# Altium PCB pcb.PcbDoc
Units mm, origin at the board's own origin, x right, y up, seen from the top; angles counter-clockwise.
Board outline 76.2 x 58.42 mm, 2 copper layers (Top Layer, Bottom Layer), stack 0.325 mm thick; 9 components, 19 nets, 123 pads, 4 vias.
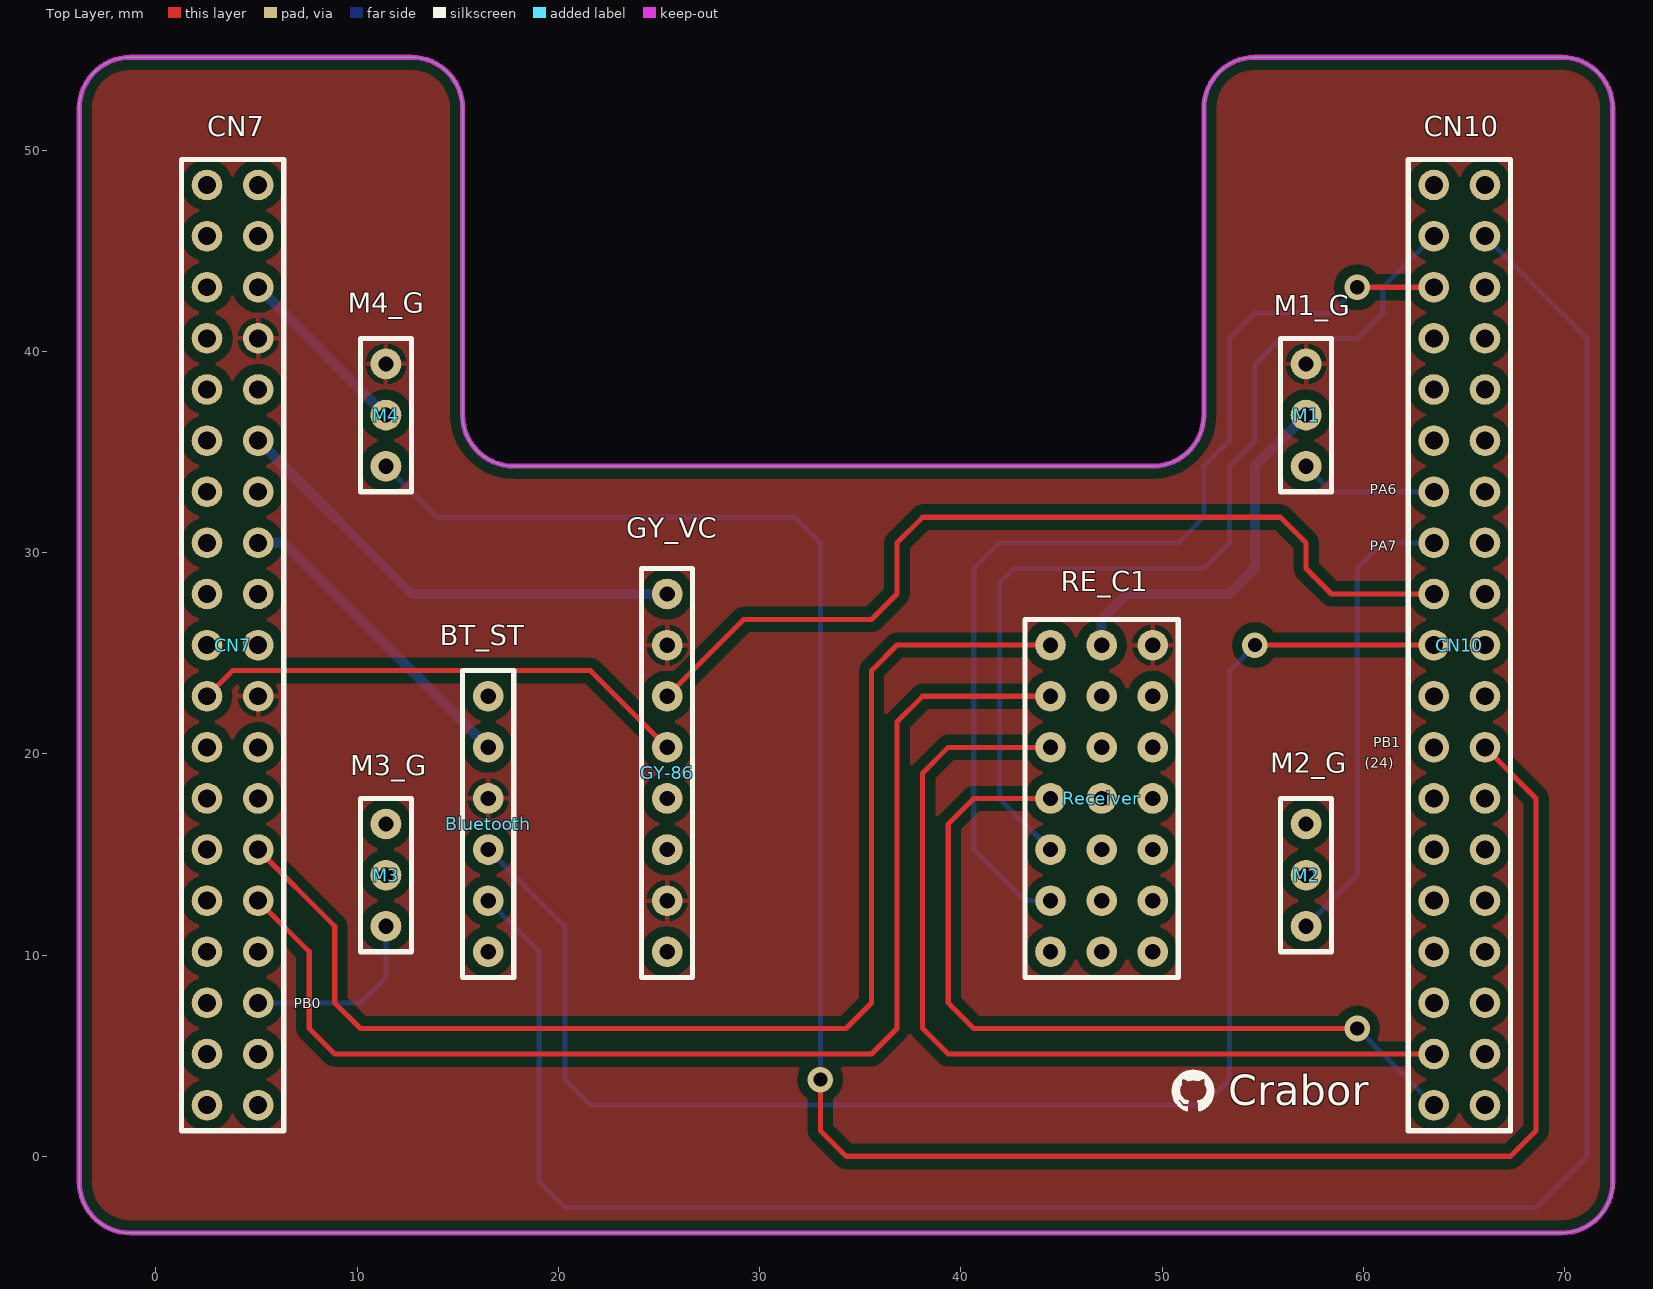
[diagram p0: Top Layer view]
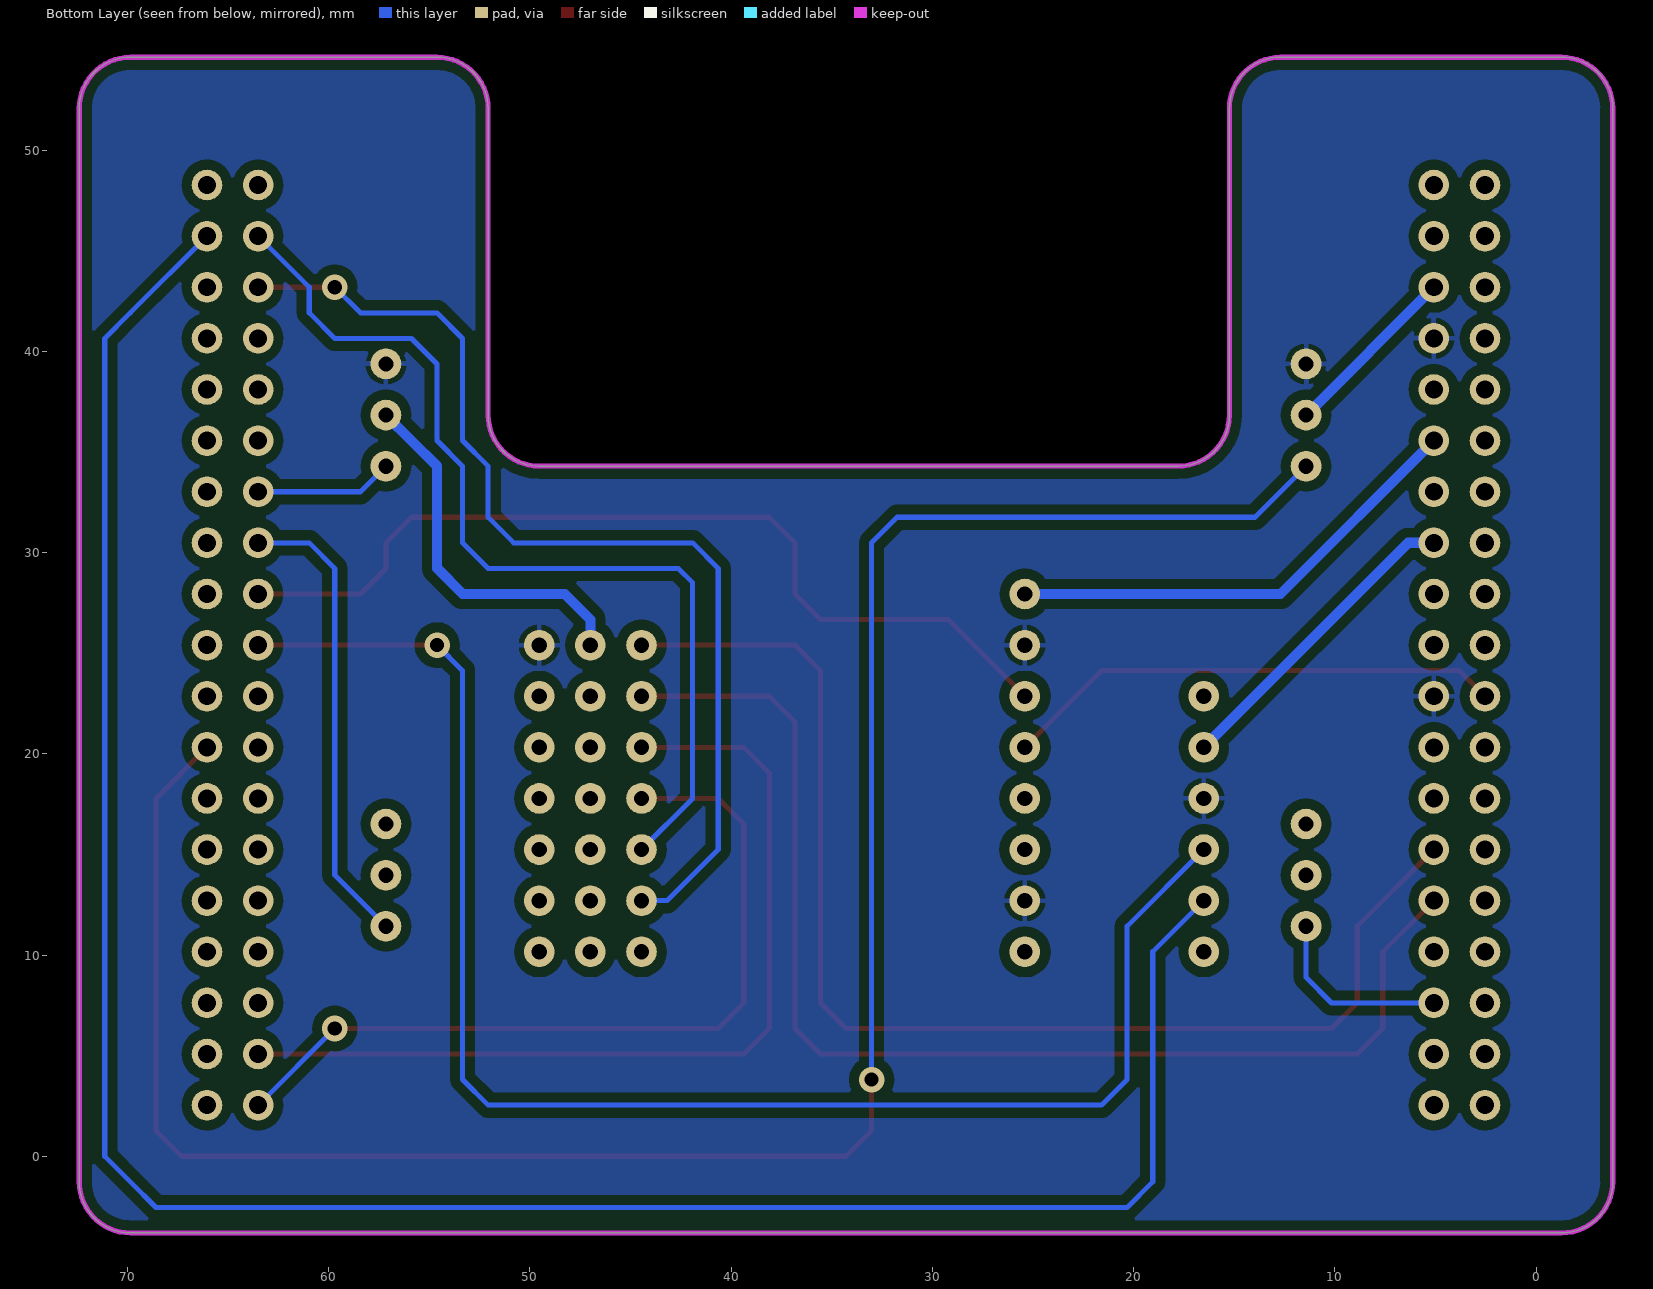
[diagram p1: Bottom Layer view, seen from below]

## Layer stack, top to bottom
Top Solder: solder mask 0.0102, Solder Resist, Dk 3.5
Top Layer: signal copper 0.0356
Dielectric 1: core 0.254, FR-4, Dk 4.2
Bottom Layer: signal copper 0.0356
Bottom Solder: solder mask 0.0102, Solder Resist, Dk 3.5

## Board outline
-3.81,-1.27 ccw(c-1.27,-1.27) -1.27,-3.81 69.85,-3.81 ccw(c69.85,-1.27) 72.39,-1.27 72.39,52.07 ccw(c69.85,52.07) 69.85,54.61 54.61,54.61 ccw(c54.61,52.07) 52.07,52.07 52.07,36.83 cw(c49.53,36.83) 49.53,34.29 17.78,34.29 cw(c17.78,36.83) 15.24,36.83 15.24,52.07 ccw(c12.7,52.07) 12.7,54.61 -1.27,54.61 ccw(c-1.27,52.07) -3.81,52.07

## Design rules (kind name [scope] priority, off if disabled: settings)
Clearance InPolygon [InPolygon] p1: gap=0.5
Clearance [All] p2: gap=0.254
PolygonConnect [All] p1: connectstyle=Relief reliefconductorwidth=0.254 reliefentries=4 polygonreliefangle="90 Angle" airgapwidth=0.254
RoutingVias [All] p1: holewidth=0.711 width=1.27 viastyle="Through Hole" minholewidth=0.711 minwidth=1.27 maxholewidth=0.711 maxwidth=1.27
SolderMaskExpansion [All] p1: expansion=0.102
Width Width_5V [InNetClass('5V')] p1: maxlimit=0.51 minlimit=0.506 preferedwidth=0.508
Width Width_3V3 [InNetClass('3V3')] p2: maxlimit=0.51 minlimit=0.506 preferedwidth=0.508
Width [All] p3: maxlimit=0.256 minlimit=0.252 preferedwidth=0.254
30 further rules are at their usual default settings.

## Classes and differential pairs
net class NO_GND: 3V3_1 3V3_2 5V_1 5V_2 PA0 PA1 PA2 PA3 PA6 PA7 PB0 PB1 PB6 PB7 PB8 PB9 PC6 PC7
net class 3V3: 3V3_1 3V3_2
net class 5V: 5V_1 5V_2

## Components (designator, comment, footprint, x,y, rotation, side; value= is the part's Value field where it differs from the comment)
Bluetooth "Bluetooth" Bluetooth 16.51,22.86 r0 top
CN7 "CN7" CN7 2.54,2.54 r0 top
CN10 "CN10" CN10 66.04,2.54 r0 top
GY-86 "GY-86" GY-86 25.4,27.94 r0 top
M1 "M" M 57.15,39.37 r0 top
M2 "M" M 57.15,16.51 r0 top
M3 "M" M 11.43,16.51 r0 top
M4 "M" M 11.43,39.37 r0 top
Receiver "Receiver" Receiver 46.99,25.4 r0 top

## Footprints (in the part's own frame and the unit in brackets; to place one, negate y for a bottom-side part, rotate by r counter-clockwise, add the part's x,y. Pads: shape width x height; smd on the part's side, far side on the other; paste and mask are expansions set on the pad)
Bluetooth [mil]
  round 60 hole 30: 1(0,0) 2(0,-100) 3(0,-200) 4(0,-300) 5(0,-400) 6(0,-500)
  silkscreen extent -50,-550 50,50
CN7 [mil]
  round 60 hole 35: 1(0,1800) 2(100,1800) 3(0,1700) 4(100,1700) 5(0,1600) 6(100,1600) 7(0,1500) 8(100,1500) 9(0,1400) 10(100,1400) 11(0,1300) 12(100,1300) 13(0,1200) 14(100,1200) 15(0,1100) 16(100,1100) 17(0,1000) 18(100,1000) 19(0,900) 20(100,900) 21(0,800) 22(100,800) 23(0,700) 24(100,700) 25(0,600) 26(100,600) 27(0,500) 28(100,500) 29(0,400) 30(100,400) 31(0,300) 32(100,300) 33(0,200) 34(100,200) 35(0,100) 36(100,100) 37(0,0) 38(100,0)
  silkscreen extent -50,-50 150,1850
CN10 [mil]
  round 60 hole 35: 1(-100,1800) 2(0,1800) 3(-100,1700) 4(0,1700) 5(-100,1600) 6(0,1600) 7(-100,1500) 8(0,1500) 9(-100,1400) 10(0,1400) 11(-100,1300) 12(0,1300) 13(-100,1200) 14(0,1200) 15(-100,1100) 16(0,1100) 17(-100,1000) 18(0,1000) 19(-100,900) 20(0,900) 21(-100,800) 22(0,800) 23(-100,700) 24(0,700) 25(-100,600) 26(0,600) 27(-100,500) 28(0,500) 29(-100,400) 30(0,400) 31(-100,300) 32(0,300) 33(-100,200) 34(0,200) 35(-100,100) 36(0,100) 37(-100,0) 38(0,0)
  silkscreen extent -150,-50 50,1850
GY-86 [mil]
  round 60 hole 30: 1(0,0) 2(0,-100) 3(0,-200) 4(0,-300) 5(0,-400) 6(0,-500) 7(0,-600) 8(0,-700)
  silkscreen extent -50,-750 50,50
M [mil]
  round 60 hole 30: 1(0,0) 2(0,-100) 3(0,-200)
  silkscreen extent -50,-250 50,50
Receiver [mil]
  round 60 hole 30: 1(0,0) 2(100,0) 3(-100,0) 4(-100,-100) 5(-100,-200) 6(-100,-300) 7(-100,-400) 8(-100,-500) ""(-100,-600) ""(0,-600) ""(0,-500) ""(0,-400) ""(0,-300) ""(0,-200) ""(0,-100) ""(100,-600) ""(100,-500) ""(100,-400) ""(100,-300) ""(100,-200) ""(100,-100)
  silkscreen extent -150,-650 150,50

## Via types
v1: diameter 1.27, hole 0.711, Top Layer to Bottom Layer, 4 vias

## Nets (pads, with @x,y where several pads share a name; then routed paths per layer and width w, separated by ;. In a path a pad name is that pad's centre, name@x,y a point inside that pad or via, vN(x,y) a via of type N, cw(c..) or ccw(c..) an arc to the next point about the centre after c; other vN are vias at no path point)
3V3_1: Bluetooth.2 CN7.16 | length 15.6
  Bottom Layer w0.51: CN7.16 6.35,30.48 Bluetooth.2
3V3_2: CN7.12 GY-86.1 | length 23.5
  Bottom Layer w0.51: CN7.12 12.7,27.94 GY-86.1
5V_1: CN7.6 M4.2 | length 9
  Bottom Layer w0.51: CN7.6 M4.2
5V_2: M1.2 Receiver.1 | length 18.6
  Bottom Layer w0.51: Receiver.1 46.99,26.67 48.26,27.94 53.34,27.94 54.61,29.21 54.61,34.29 55.879,35.559 M1.2
GND: Bluetooth.3 CN7.8 CN7.22 GY-86.2 GY-86.7 M1.1 M4.1 Receiver.2
PA0: CN7.28 Receiver.3 | length 62.8
  Top Layer w0.256: CN7.28 8.89,11.43 8.89,7.62 10.16,6.35 34.29,6.35 35.56,7.62 35.56,24.13 36.83,25.4 Receiver.3
PA1: CN7.30 Receiver.4 | length 61.1
  Top Layer w0.256: CN7.30 7.62,10.16 7.62,6.35 8.89,5.08 35.56,5.08 36.83,6.35 36.83,21.59 38.1,22.86 Receiver.4
PA2: CN10.35 Receiver.5 | length 45.5
  Top Layer w0.254: Receiver.5 39.37,20.32 38.1,19.05 38.1,6.35 39.37,5.08 CN10.35
PA3: CN10.37 Receiver.6 | length 40.7
  Top Layer w0.254: Receiver.6 40.64,17.78 39.37,16.51 39.37,7.62 40.64,6.35 v1(59.69,6.35)
  Bottom Layer w0.254: v1(59.69,6.35) CN10.37
PA6: CN10.13 M1.3 | length 6.9
  Bottom Layer w0.254: M1.3 58.42,33.02 CN10.13
PA7: CN10.15 M2.3 | length 23.2
  Bottom Layer w0.256: M2.3 59.69,13.97 59.69,29.21 60.96,30.48 CN10.15
PB0: CN7.34 M3.3 | length 9.4
  Bottom Layer w0.256: CN7.34 10.16,7.62 11.43,8.89 M3.3
PB1: CN10.24 M4.3 | length 109.1
  Top Layer w0.254: v1(33.02,3.81) 33.02,1.27 34.29,0 67.31,0 68.58,1.27 68.58,17.78 CN10.24
  Bottom Layer w0.254: M4.3 13.97,31.75 31.75,31.75 33.02,30.48 v1(33.02,3.81)
PB6: CN10.17 GY-86.3 | length 45.6
  Top Layer w0.256: GY-86.3 29.21,26.67 35.56,26.67 36.83,27.94 36.83,30.48 38.1,31.75 55.88,31.75 57.15,30.48 57.15,29.21 58.42,27.94 CN10.17
PB7: CN7.21 GY-86.4 | length 25
  Top Layer w0.254: CN7.21 3.81,24.13 21.59,24.13 GY-86.4
PB8: CN10.3 Receiver.7 | length 48.2
  Bottom Layer w0.254: Receiver.7 41.91,17.78 41.91,28.495 42.625,29.21 52.07,29.21 53.34,30.48 53.34,34.29 54.61,35.56 54.61,39.37 55.88,40.64 59.69,40.64 60.96,41.91 60.96,43.18 CN10.3
PB9: CN10.5 Receiver.8 | length 51.9
  Top Layer w0.254: v1(59.69,43.18) CN10.5
  Bottom Layer w0.254: Receiver.8 43.18,12.7 40.64,15.24 40.64,29.21 41.91,30.48 50.8,30.48 52.07,31.75 52.07,34.29 53.34,35.56 53.34,40.64 54.61,41.91 58.42,41.91 v1(59.69,43.18)
PC6: Bluetooth.5 CN10.4 | length 116.5
  Bottom Layer w0.254: Bluetooth.5 19.05,10.16 19.05,-1.27 20.32,-2.54 68.58,-2.54 69.85,-1.27 71.12,0 71.12,40.64 69.85,41.91 CN10.4
PC7: Bluetooth.4 CN10.19 | length 78.1
  Top Layer w0.254: v1(54.61,25.4) CN10.19
  Bottom Layer w0.254: Bluetooth.4 20.32,11.43 20.32,3.81 21.59,2.54 52.07,2.54 53.34,3.81 53.34,24.13 v1(54.61,25.4)
pads on no net: Bluetooth.1 Bluetooth.6 CN7.1 CN7.2 CN7.3 CN7.4 CN7.5 CN7.7 CN7.9 CN7.10 CN7.11 CN7.13 CN7.14 CN7.15 CN7.17 CN7.18 CN7.19 CN7.20 CN7.23 CN7.24 CN7.25 CN7.26 CN7.27 CN7.29 CN7.31 CN7.32 CN7.33 CN7.35 CN7.36 CN7.37 CN7.38 CN10.1 CN10.2 CN10.6 CN10.7 CN10.8 CN10.9 CN10.10 CN10.11 CN10.12 CN10.14 CN10.16 CN10.18 CN10.20 CN10.21 CN10.22 CN10.23 CN10.25 CN10.26 CN10.27 CN10.28 CN10.29 CN10.30 CN10.31 CN10.32 CN10.33 CN10.34 CN10.36 CN10.38 GY-86.5 GY-86.6 GY-86.8 M2.1 M2.2 M3.1 M3.2 Receiver.

## Polygon pours and split planes (outlines as drawn)
GND on Top Layer "Top-Layer-GND" (solid, pour order 2): -3.81,-3.81 -3.81,54.61 15.24,54.61 15.24,35.56 16.51,34.29 50.8,34.29 52.07,35.56 52.07,54.61 72.39,54.61 72.39,-3.81 -3.81,-3.81
GND on Bottom Layer "Bottom-Layer-GND" (solid, pour order 4): -3.81,-3.81 -3.81,54.61 15.24,54.61 15.24,35.56 16.51,34.29 50.8,34.29 52.07,35.56 52.07,54.61 72.39,54.61 72.39,-3.81 -3.81,-3.81

## Keep-outs
Keep-Out Layer:
  the board outline again, w0.254

## Silkscreen, mask and mechanical layers (free items; w line width, h text height)
Top Overlay:
  drawing of 160 lines, arcs and shapes, not listed
  text "PA6" at 60.325,32.893 h0.5
  text "PA7" at 60.325,30.099 h0.5
  text "PB1" at 60.492,20.32 h0.5
  text "(24)" at 60.075,19.304 h0.5
  text "PB0" at 6.858,7.366 h0.5
  text "Crabor" at 53.291,2.54 h1.5
Mechanical 1:
  the board outline again, w0.254

## Text inside footprints (layer, text, board x,y; h text height)
Bluetooth: Top Overlay "BT_ST" at 14.097,25.4 h1
GY-86: Top Overlay "GY_VC" at 23.368,30.734 h1
M1: Top Overlay "M1_G" at 55.539,41.783 h1
M2: Top Overlay "M2_G" at 55.372,19.05 h1
M3: Top Overlay "M3_G" at 9.652,18.923 h1
M4: Top Overlay "M4_G" at 9.525,41.91 h1
Receiver: Top Overlay "RE_C1" at 44.958,28.067 h1